# Altium PCB Copy of sample_sogipll_test.PcbDoc
Units mm, origin at the board's own origin, x right, y up, seen from the top; angles counter-clockwise.
Board outline 72 x 53 mm, 2 copper layers (Top Layer, Bottom Layer), stack 1.671 mm thick; 29 components, 23 nets, 123 pads, 10 vias.
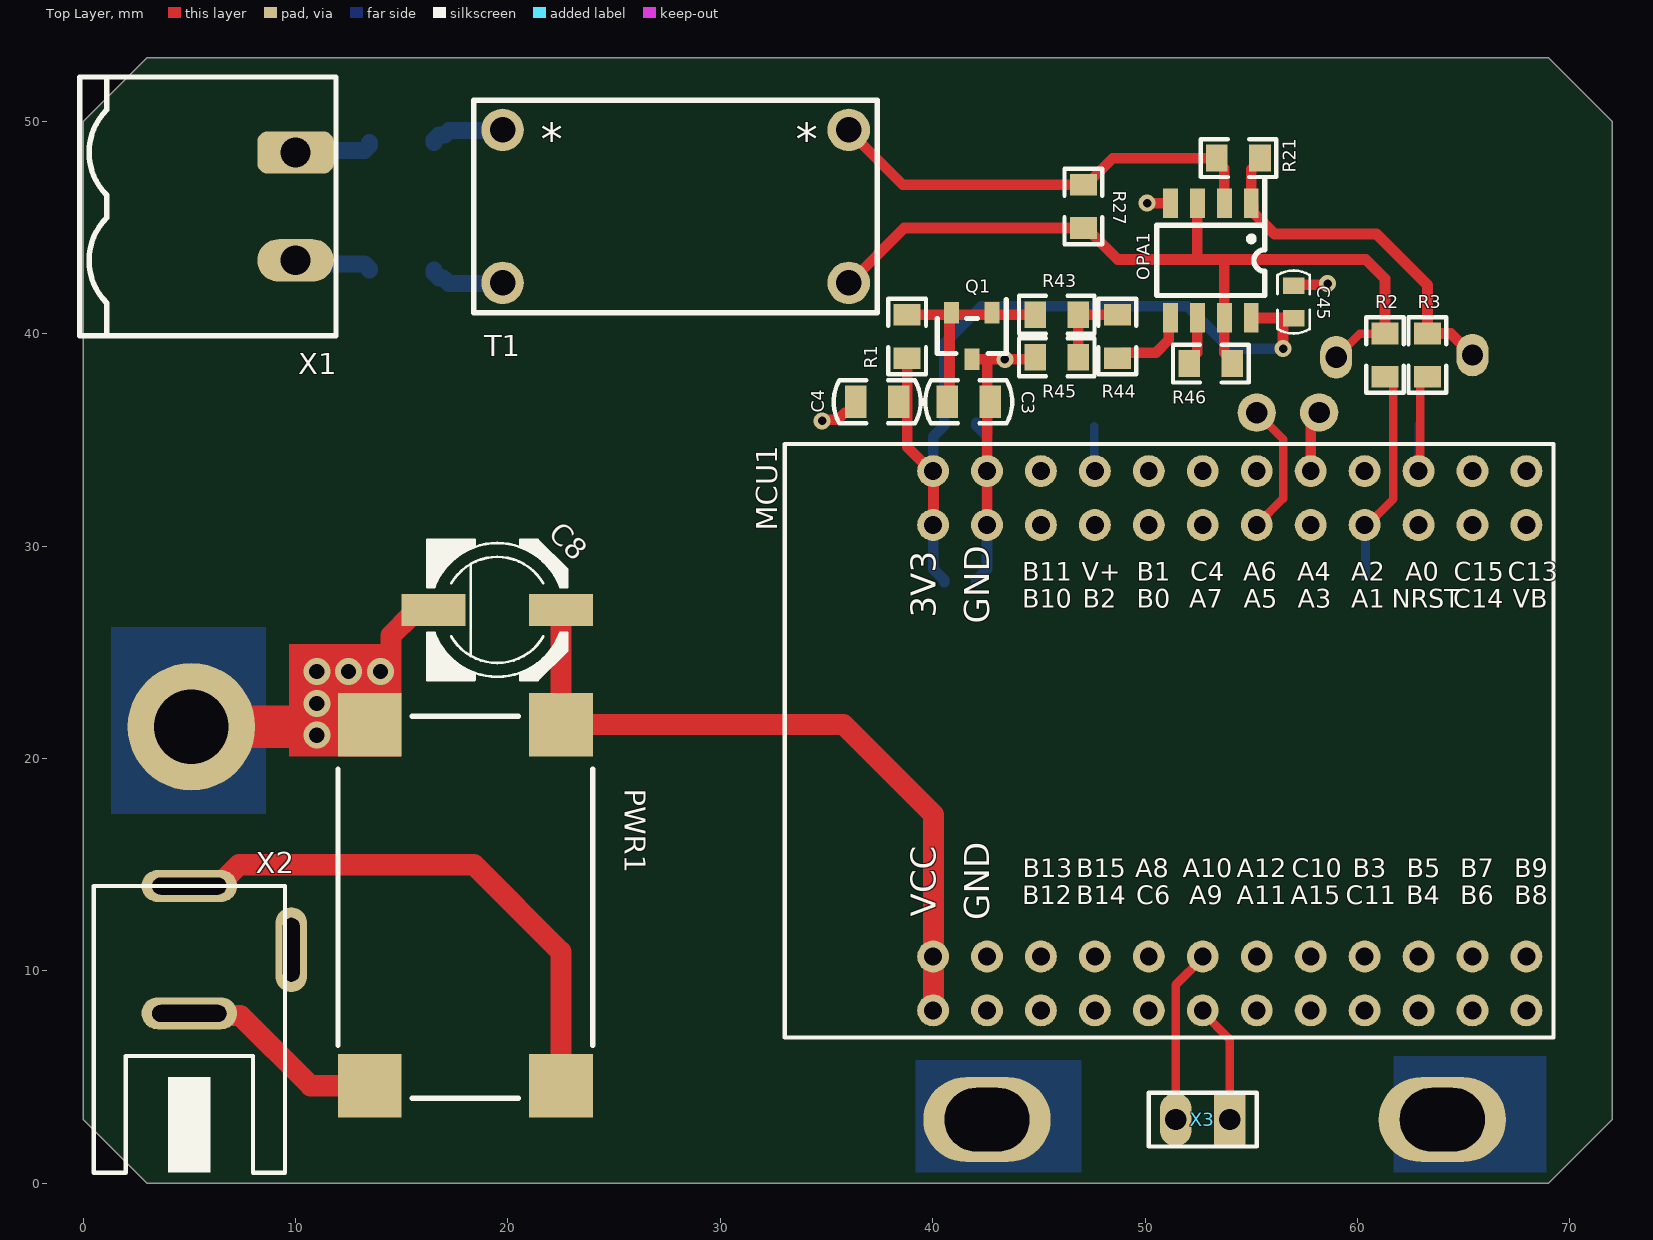
[diagram p0: Top Layer view]
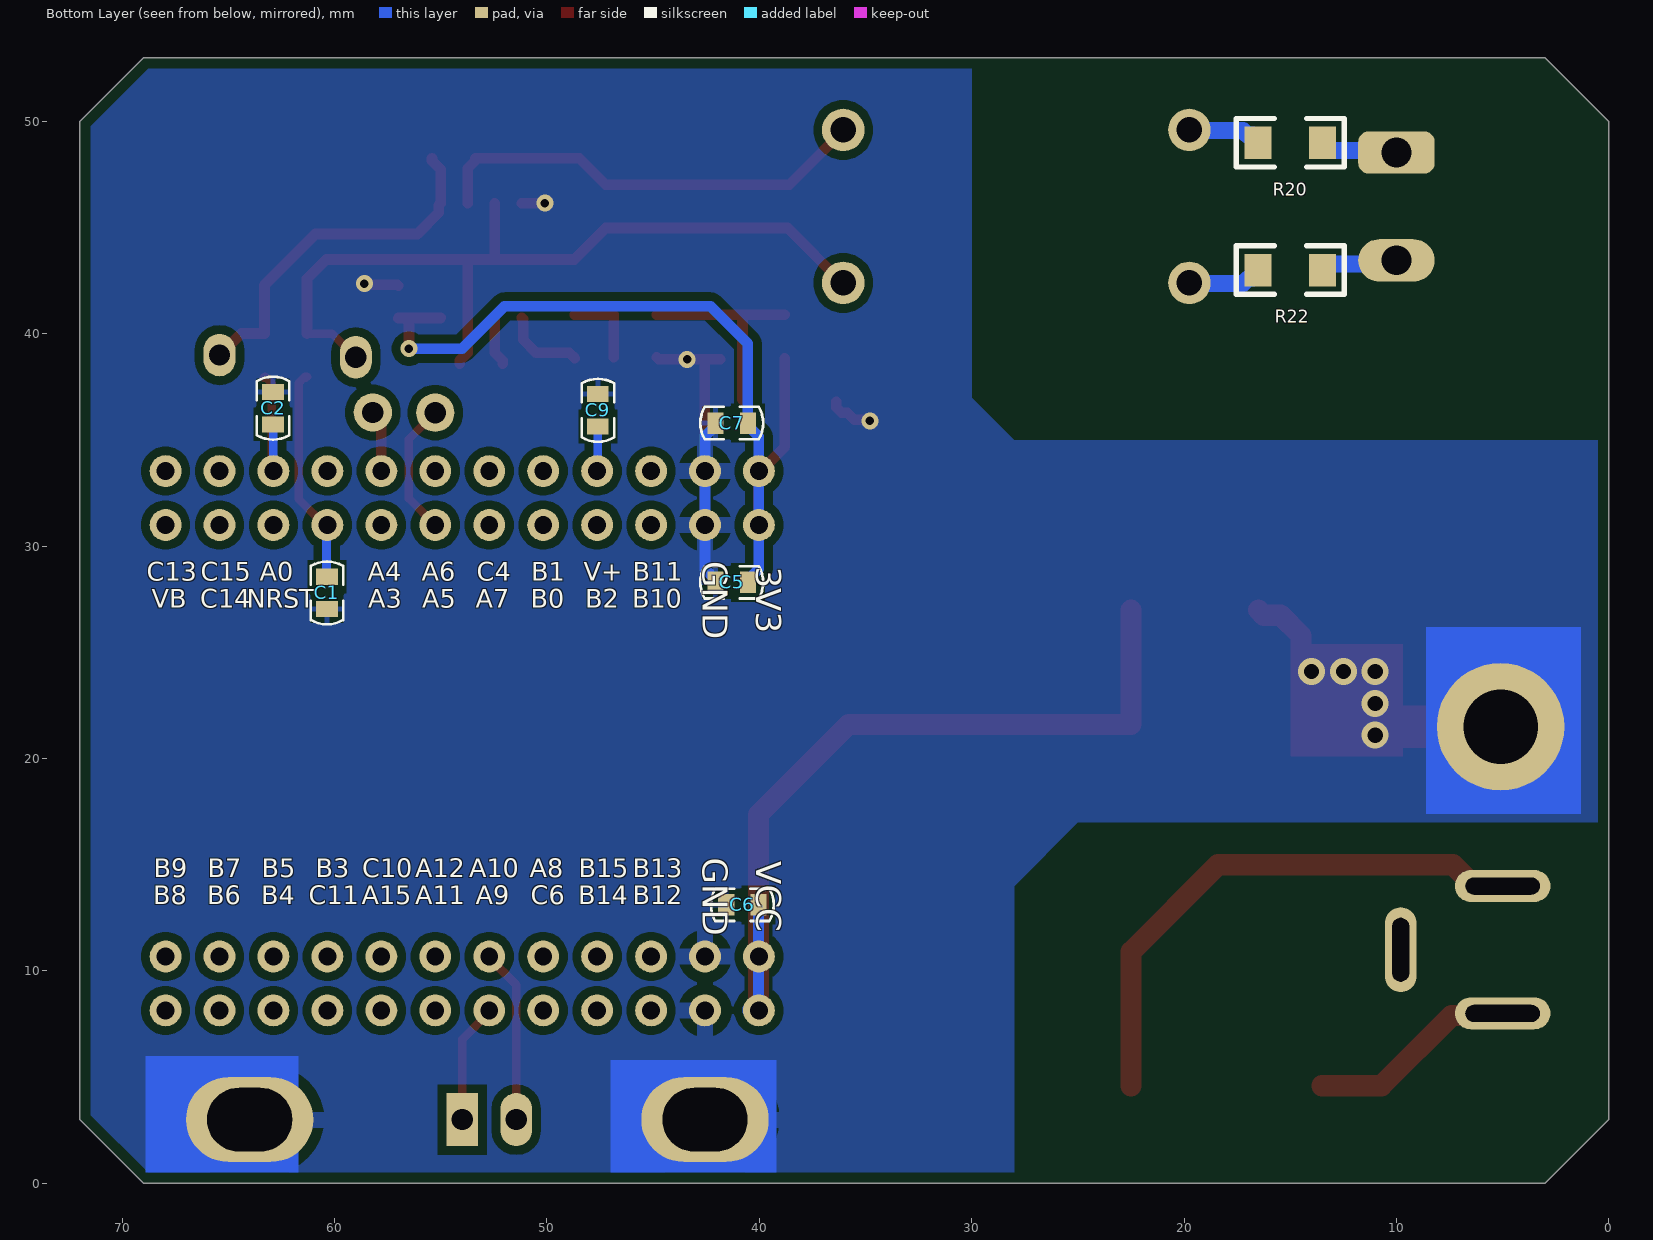
[diagram p1: Bottom Layer view, seen from below]

## Layer stack, top to bottom
Top Solder: solder mask 0.0102, Solder Resist, Dk 3.5
Top Layer: signal copper 0.0356
Dielectric 1: dielectric 1.6, FR-4, Dk 4.8
Bottom Layer: signal copper 0.0356
Bottom Solder: solder mask 0.0102, Solder Resist, Dk 3.5

## Board outline
0,3 0,50 3,53 69,53 72,50 72,3 69,0 3,0

## Design rules (kind name [scope] priority, off if disabled: settings)
BoardOutlineClearance [All] p1: gap=0.254 ignorepadtopadclearanceinfootprint=FALSE except(0: Arc-SplitContinuation Track-SplitContinuation SMDPad-SplitContinuation THPad-SplitContinuation Via-SplitContinuation Fill-SplitContinuation Poly-SplitContinuation Region-SplitContinuation Text-SplitContinuation; 0.508: Poly-OutlineEdge)
Clearance [All] p1: gap=0.2 ignorepadtopadclearanceinfootprint=FALSE except(0.4: Arc-Fill Arc-Poly Arc-Region Track-Fill Track-Poly Track-Region SMDPad-Fill SMDPad-Poly SMDPad-Region THPad-Fill THPad-Poly THPad-Region Via-Fill Via-Poly Via-Region Fill-Fill Fill-Poly Fill-Region Poly-Poly Poly-Region Region-Region)
Height [All] p1: minheight=0 maxheight=254 prefheight=12.7
HoleSize [All] p1: absolutevalues=TRUE maxlimit=12.7 minlimit=0.025 maxpercent=80.000 minpercent=20.000
PolygonConnect [All] p1: thpad.connectstyle=Relief thpad.reliefconductorwidth=0.762 thpad.reliefentries=4 thpad.polygonreliefangle="90 Angle" thpad.airgapwidth=0.508 smdpad.connectstyle=Relief smdpad.reliefconductorwidth=0.254 smdpad.reliefentries=4 smdpad.polygonreliefangle="90 Angle" smdpad.airgapwidth=0.254 via.connectstyle=Direct via.reliefconductorwidth=0.254 via.reliefentries=4 via.polygonreliefangle="90 Angle" via.airgapwidth=0.254
RoutingVias [All] p1: holewidth=0.711 width=1.27 viastyle="Through Hole" minholewidth=0.076 minwidth=0.127 maxholewidth=0.711 maxwidth=1.27
SilkToSilkClearance [All] p1: silktosilkclearance=-0.025
SilkToSolderMaskClearance [IsPad] p1: minsilkscreentomaskgap=-0.025 clearancetoexposedcopper=TRUE
SolderMaskExpansion [All] p1: expansion=0.102 istentingtop=FALSE
Width [All] p1: maxlimit=254 minlimit=0.127 preferedwidth=0.254
26 further rules are at their usual default settings.

## Components (designator, comment, footprint, x,y, rotation, side; value= is the part's Value field where it differs from the comment)
C1 "10nF" 0603C 60.36,27.8 r270 bottom
C2 "10nF" 0603C 62.9,36.5 r90 bottom
C3 "10uF" 0805C 41.7,36.8 r0 top
C4 "10uF" 0805C 37.389,36.8 r180 top
C5 "100nF" 0603C 41.3,28.3 r0 bottom
C6 "100nF" 0603C 40.8,13.11 r0 bottom
C7 "100nF" 0603C 41.3,35.8 r0 bottom
C8 "CAP Pol" CAP-ALU-SMD-06.3 19.5,27 r270 top
C9 "100nF" 0603C 47.6,36.4 r90 bottom
C45 "100nF" 0603C 57,41.5 r90 top
MCU1 "WeArt STM32G431CBU6" "WEART STM32G431CBU6" 53.99,20.84 r0 top
OPA1 "LMV358" "SO-08 - P1.27MM" 53.1,43.455 r270 top
PWR1 "DCDC_module" MiniDCDC 18,13 r90 top
Q1 "TL431 SOT-23" sot-23 41.845,39.899 r180 top
R1 "100R" 0805R 38.8,39.876 r270 top value=10K
R2 "100R" 0805R 61.3,39 r270 top value=10K
R3 "100R" 0805R 63.3,39 r270 top value=10K
R20 "200k" 1206R 15,49 r180 bottom value=10K
R21 "2k" 0805R 54.4,48.275 r180 top value=10K
R22 "200k" 1206R 15,43 r180 bottom value=10K
R27 "2k" 0805R 47.1,46 r270 top value=10K
R43 "10k" 0805R 45.845,40.899 r180 top value=10K
R44 "10k" 0805R 48.7,39.876 r270 top value=10K
R45 "20k" 0805R 45.845,38.899 r0 top value=10K
R46 "10k" 0805R 53.1,38.6 r0 top value=10K
T1 "ZMPT107" ZMPT107-1 27.9,46 r0 top
X1 "Header 2" 2EDGRG-5.08-02P 10,46 r270 top
X2 "DC_Port" DC-5.5mm 5,11 r90 top
X3 "Header 2" HDR1X2 52.72,3 r180 top

## Footprints (in the part's own frame and the unit in brackets; to place one, negate y for a bottom-side part, rotate by r counter-clockwise, add the part's x,y. Pads: shape width x height; smd on the part's side, far side on the other; paste and mask are expansions set on the pad)
2EDGRG-5.08-02P [mm]
  rrect50% 2x3.6 hole 1.4: 1(-2.54,0)
  oval 2x3.6 hole 1.4: 2(2.54,0)
  silkscreen extent -6.1,-10.16 6.1,1.91, body extent -6,-10 6,2, height 8.6
0603C [mil]
  rect 30x40 smd: 1(-30,0) 2(30,0)
  silkscreen extent -58,-30 58,30, body extent -31,-16 31,16, height 31
0805C [mil]
  rect 40x60 smd: 1(-40,0) 2(40,0)
  silkscreen extent -80,-40 80,40, body extent -39,-24 39,24, height 47
0805R [mil]
  rect 40x50 smd: 1(-40,0) 2(40,0)
  silkscreen extent -70,-35 70,35, body extent -39,-25 39,25, height 18
1206R [mil]
  rect 50x60 smd: 1(-60,0) 2(60,0)
  silkscreen extent -100,-45 100,45, body extent -63,-31 63,31, height 22
CAP-ALU-SMD-06.3 [mm]
  rect 1.5x3 smd: 1(0,3) 2(0,-3)
  silkscreen extent -3.3,-3.3 3.3,3.3, body extent -3.3,-3.65 3.3,3.65, height 5.8
DC-5.5mm [mm]
  oval 1.5x4.5 hole 0.8 slot 3.5 at 90 deg: 1(3,0) 3(-3,0)
  oval 4x1.5 hole 0.8 slot 3 at 0 deg: 2(0,-4.8)
  silkscreen extent -10.5,-4.5 3,4.5
HDR1X2 [mm]
  rect 1.5x2.5 hole 1: 1(-1.27,0)
  oval 1.5x2.5 hole 1: 2(1.27,0)
  silkscreen extent -2.54,-1.27 2.54,1.27, body extent -2.54,-1.27 2.54,1.27, height 8.38
MiniDCDC [mm]
  rect 3x3 smd: 1(-8.4,-4.5) 2(-8.4,4.5) 3(8.6,-4.5) 4(8.6,4.5)
  silkscreen extent -9,-6 9,6
"SO-08 - P1.27MM" [mm]
  rect 1.4x0.7 smd: 1(-2.7,1.905) 2(-2.7,0.635) 3(-2.7,-0.635) 4(-2.7,-1.905) 5(2.7,-1.905) 6(2.7,-0.635) 7(2.7,0.635) 8(2.7,1.905)
  silkscreen extent -3.81,-2.54 1.65,2.54, body extent -3,-2.45 3,2.45, height 1.59
sot-23 [mm]
  rect 0.7x1 smd: 1(-0.95,-1.1) 2(0.95,-1.1) 3(0,1.1)
  silkscreen extent -1.62,-1.71 1.63,0.82, body extent -1.46,-1.17 1.46,1.17, height 1
"WEART STM32G431CBU6" [mil]
  round 59 hole 33 paste+0 mask+1: 1(550,-400) 2(550,-500) 3(450,-400) 4(450,-500) 5(350,-400) 6(350,-500) 7(250,-400) 8(250,-500) 9(150,-400) 10(150,-500) 11(50,-400) 12(50,-500) 13(-50,-400) 14(-50,-500) 15(-150,-400) 16(-150,-500) 17(-250,-400) 18(-250,-500) 19(-350,-400) 20(-350,-500) 21(-450,-400) 22(-450,-500) 23(-550,-400) 24(-550,-500) 25(550,500) 26(550,400) 27(450,500) 28(450,400) 29(350,500) 30(350,400) 31(250,500) 32(250,400) 33(150,500) 34(150,400) 35(50,500) 36(50,400) 37(-50,500) 38(-50,400) 39(-150,500) 40(-150,400) 41(-250,500) 42(-250,400) 43(-350,500) 44(-350,400) 45(-450,500) 46(-450,400) 47(-550,500) 48(-550,400)
  silkscreen extent -825,-550 600,550, body extent -600,-550 600,550, height 236
ZMPT107-1 [mm]
  round 2 hole 1.2: 1(-8.15,3.6) 2(-8.15,-3.6) 3(8.15,3.6) 4(8.15,-3.6)
  silkscreen extent -9.5,-5 9.5,5, body extent -9.5,-5 9.5,5, height 18.2

## Part data
C1 C2 C3 C4 C5 C6 C7 C9 C45: library part CAP
OPA1: library part LM258, "Operational Amplifier", Manufacture=TI, Published=20101030, Publisher=zly, Type=LM258D/OPA2227/tlc082
PWR1: BOM_JLCPCB SMD=Yes, BOM_Manufacturer=XLSEMI, BOM_Manufacturer Part=XL2596T-12E1, BOM_Supplier=LCSC, BOM_Supplier Part=C74187, image=//image.lceda.cn/szlcsc/C74187.jpg, SMT Type=Extend, spicePre=U, spiceSymbolName=XL2596T-12E1
Q1: Manufacture="TEXAS INSTRUMENTS"
R1 R2 R3 R20 R21 R22 R27 R43 R44 R45 R46: library part Res1, "Resistor", Published=20101211, Publisher=zly, Revision="July-2002: Re-released for DXP Platform."
T1: library part Trans, "DVDI-001", Published=20101030, Publisher=zly
X1 X2 X3: Published=20101030, Publisher=zly

## Free pads (board coordinates)
  round 1.8 hole 1: 2(55.26,36.288) 2(58.2,36.3)
  oval 1.5x2 hole 1: 2(59,38.899) 2(65.42,39)
  round 6 hole 3.5: 3(5.096,21.5)
  oval 6x4 hole 3 slot 4 at 0 deg: ""(42.56,3) ""(64,3)

## Via types
v1: diameter 0.8, hole 0.4, Top Layer to Bottom Layer, tented both sides, 5 vias
v2: diameter 1.27, hole 0.711, Top Layer to Bottom Layer, 5 vias

## Nets (pads, with @x,y where several pads share a name; then routed paths per layer and width w, separated by ;. In a path a pad name is that pad's centre, name@x,y a point inside that pad or via, vN(x,y) a via of type N, cw(c..) or ccw(c..) an arc to the next point about the centre after c; other vN are vias at no path point)
+3.3: C4.1 C5.1 C7.1 C45.1 MCU1.47 MCU1.48 OPA1.8 R1.2 | length 41.2
  Top Layer w0.5: R1.2 38.8,34.67 40.04,33.43 MCU1.48@40.04,30.89 ; OPA1.8 55.013,40.746 C45.1@56.7,40.746 ; v1(56.5,39.3) 56.5,40.546 C45.1@56.7,40.746 ; C45.1 56.992,40.746 C45.1@56.7,40.746
  Bottom Layer w0.5: C5.1 40.538,28.427 40.02,28.945 40.02,30.87 40.02,35.155 40.538,35.673 C7.1 40.538,39.538 42.3,41.3 52,41.3 54,39.3 v1(56.5,39.3)
+5: C6.1 C8.1 MCU1.23 MCU1.24 PWR1.3 | length 39.1
  Top Layer w1: C8.1 PWR1.3 35.8,21.6 40.04,17.36 MCU1.24@40.04,8.14
  Bottom Layer w0.5: C6.1@40.04,13.11 40.04,8.725 40.538,8.227 MCU1.24@40.538,8.1
ADC1_IN1: C2.1 MCU1.29 R3.2 | length 7.1
  Top Layer w0.4: MCU1.29@62.9,33.43 62.955,33.485 62.955,37.676 63.263,37.984 R3.2 R3.2@63.342,37.942
  Bottom Layer w0.4: MCU1.29@62.9,33.43 C2.1
ADC1_IN2: C1.1 MCU1.32 R2.2 | length 12.6
  Top Layer w0.4: MCU1.32@60.36,30.89 61.7,32.23 61.7,37.676 R2.2@61.392,37.984 ; R2.2 R2.2@61.392,37.984 ; R2.2@61.35,37.942 R2.2@61.392,37.984
  Bottom Layer w0.4: C1.1 60.36,30.89 60.383,30.867 60.383,28.584 C1.1@60.405,28.562
DAC1_OUT1: MCU1.33 pad.2@58.2,36.3 | length 2.9
  Top Layer w0.5: MCU1.33 57.8,35.9 pad.2@58.2,36.3
DAC1_OUT2: MCU1.36 pad.2@55.26,36.288 | length 6.3
  Top Layer w0.4: MCU1.36 56.5,32.24 56.5,35.048 pad.2@55.26,36.288
GND: C1.2 C2.2 C3.2 C4.2 C5.2 C6.2 C7.2 C8.2 C9.2 C45.2 MCU1.21 MCU1.22 MCU1.45 MCU1.46 OPA1.4 pad. pad.3 PWR1.4 Q1.3 R45.1 | length 38
  Top Layer w0.5: PWR1.4@13.4,21.5 PWR1.4 ; v1(34.8,35.9) 34.857,35.957 35.53,35.957 35.861,36.288 36.115,36.288 36.373,36.546 C4.2 ; Q1.3 42.623,38.799 ; MCU1.46@42.58,30.89 42.58,33.43 42.58,38.756 42.623,38.799 ; R45.1 44.729,38.799 v1(43.4,38.799) 42.623,38.799 ; v1(50.1,46.155) OPA1.4 ; C45.2 57.051,42.313 58.549,42.313 v1(58.6,42.364)
  Top Layer w1: v2(12.5,24.1) v2(14,24.1) 14,24.4 14.5,24.9 14.5,25.8 15.45,26.75 16.25,26.75 C8.2
  Top Layer w2: pad.3 PWR1.4@13.4,21.5
  Bottom Layer w0.5: C5.2 42.062,28.427 42.56,28.925 42.56,30.87 42.56,35.175 42.062,35.673 C7.2
  other v2: 11,21.1 11,22.6 11,24.1
NetOPA1_2: OPA1.2 R21.2 R27.1 T1.3 | length 21.2
  Top Layer w0.5: T1.3@36.05,49.564 38.598,47.016 R27.1 47.227,47.016 48.486,48.275 R21.2 53.384,48.148 53.735,47.798 OPA1.2
NetOPA1_5: OPA1.5 R44.2 | length 3.8
  Top Layer w0.5: R44.2 48.958,39.118 50.518,39.118 51.119,39.719 51.119,40.679 OPA1.5
NetOPA1_6: OPA1.6 R46.1 | length 2.3
  Top Layer w0.5: R46.1 52.084,38.727 52.465,39.108 OPA1.6
NetR20_1: R20.1 T1.1 | length 3.5
  Bottom Layer w0.8: R20.1 16.524,49.127 16.759,49.362 17.026,49.362 17.228,49.564 T1.1@19.75,49.564
NetR22_1: R22.1 T1.2 | length 3.6
  Bottom Layer w0.8: R22.1 16.524,42.873 16.759,42.638 16.954,42.638 17.228,42.364 T1.2@19.75,42.364
NetR43_1: R43.1 R44.1 R45.2 | length 3.8
  Top Layer w0.5: R45.2 R43.1 ; R43.1@46.868,40.892 R44.1
REF1: OPA1.3 OPA1.7 pad.2@59,38.899 R2.1 R27.2 R46.2 T1.4 | length 40.6
  Top Layer w0.4: pad.2@59,38.899 60.117,40.016 R2.1
  Top Layer w0.5: T1.4@36.253,42.364 36.05,42.364 38.67,44.984 R27.2 47.227,44.984 48.711,43.5 52.465,43.5 ; OPA1.3 52.465,43.5 ; R46.2 54.116,38.727 53.735,39.108 OPA1.7 53.735,43.5 ; R2.1 61.3,42.597 60.397,43.5 53.735,43.5 ; 52.465,43.5 53.735,43.5
REF2.5: C3.1 Q1.1 Q1.2 R1.1 R43.2 | length 10.2
  Top Layer w0.5: R1.1 38.803,40.895 44.826,40.895 R43.2 ; C3.1 40.795,36.911 Q1.2@40.795,40.892
Uin+: PWR1.1 X2.1 | length 25.9
  Top Layer w1: X2.1 6.365,14 6.75,14.385 6.75,14.414 7.336,15 18.4,15 22.5,10.9 PWR1.1
Uin-: PWR1.2 X2.3 | length 9.9
  Top Layer w1: X2.3 5.096,7.904 7.396,7.904 10.7,4.6 PWR1.2
UL: R22.2 X1.2 | length 3.7
  Bottom Layer w0.8: X1.2 10.16,43.3 13.241,43.3 13.476,43.065 R22.2
UL_sample: OPA1.1 pad.2@65.42,39 R3.1 R21.1 | length 17.2
  Top Layer w0.5: R21.1 55.416,48.148 55.005,47.737 OPA1.1 55.105,46.055 55.105,45.695 56.1,44.7 60.9,44.7 63.3,42.3 R3.1 64.404,40.016 pad.2@65.42,39
UN: R20.2 X1.1 | length 3.7
  Bottom Layer w0.8: X1.1 10.098,48.638 13.241,48.638 13.476,48.873 R20.2
USART1_RX: MCU1.13 X3.2 | length 8.1
  Top Layer w0.4: X3.2 51.45,9.35 MCU1.13@52.7,10.6
USART1_TX: MCU1.14 X3.1 | length 5.6
  Top Layer w0.4: MCU1.14@52.7,8.07 53.99,6.78 X3.1
V+: C9.1 MCU1.41 | length 2.1
  Bottom Layer w0.4: C9.1 47.62,35.618 47.62,33.53 MCU1.41@47.64,33.51
pads on no net: MCU1.1 MCU1.2 MCU1.3 MCU1.4 MCU1.5 MCU1.6 MCU1.7 MCU1.8 MCU1.9 MCU1.10 MCU1.11 MCU1.12 MCU1.15 MCU1.16 MCU1.17 MCU1.18 MCU1.19 MCU1.20 MCU1.25 MCU1.26 MCU1.27 MCU1.28 MCU1.30 MCU1.31 MCU1.34 MCU1.35 MCU1.37 MCU1.38 MCU1.39 MCU1.40 MCU1.42 MCU1.43 MCU1.44 X2.2

## Polygon pours and split planes (outlines as drawn)
GND on Bottom Layer "GND_L02_P000" (solid, remove dead copper, pour order 0): 0,17 25,17 28,14 28,0.3 72,0.3 72,53 30,53 30,37 28,35 0,35

## Other copper
Top Layer:
  rectangle net GND: 9.7,20.1 15,25.4
Bottom Layer:
  rectangle net GND: 1.3,17.4 8.6,26.2
  rectangle net GND: 39.2,0.5 47,5.8
  rectangle net GND: 61.7,0.5 68.9,6

## Silkscreen, mask and mechanical layers (free items; w line width, h text height)
Mechanical 1:
  the board outline again, w0.2

## Text inside footprints (layer, text, board x,y; h text height)
MCU1: Top Overlay "3V3" at 40.537,26.622 h2 r90; Top Overlay "GND" at 43.077,26.351 h2 r90; Top Overlay "B11" at 44.228,28.069 h1.5; Top Overlay "B10" at 44.216,26.802 h1.5; Top Overlay "V+" at 47.017,28.072 h1.5; Top Overlay "B2" at 47.08,26.796 h1.5; Top Overlay "B1" at 49.619,28.069 h1.5; Top Overlay "B0" at 49.607,26.802 h1.5; Top Overlay "C4" at 52.128,28.072 h1.5; Top Overlay "A7" at 52.092,26.802 h1.5; Top Overlay "A6" at 54.627,28.072 h1.5; Top Overlay "A5" at 54.639,26.806 h1.5; Top Overlay "A4" at 57.161,28.072 h1.5; Top Overlay "A3" at 57.181,26.802 h1.5; Top Overlay "A2" at 59.717,28.067 h1.5; Top Overlay "A1" at 59.717,26.801 h1.5; Top Overlay "A0" at 62.245,28.072 h1.5; Top Overlay "NRST" at 61.624,26.802 h1.5; Top Overlay "C15" at 64.535,28.073 h1.5; Top Overlay "C14" at 64.517,26.802 h1.5; Top Overlay "C13" at 67.076,28.072 h1.5; Top Overlay "VB" at 67.314,26.802 h1.5; Top Overlay "B3" at 59.783,14.102 h1.5; Top Overlay "B9" at 67.397,14.102 h1.5; Top Overlay "C10" at 56.9,14.102 h1.5; Top Overlay "A12" at 54.326,14.097 h1.5; Top Overlay "B7" at 64.855,14.103 h1.5; Top Overlay "B5" at 62.322,14.107 h1.5; Top Overlay "B8" at 67.391,12.832 h1.5; Top Overlay "C11" at 59.452,12.832 h1.5; Top Overlay "B6" at 64.85,12.832 h1.5; Top Overlay "B4" at 62.304,12.832 h1.5; Top Overlay "A15" at 56.868,12.835 h1.5; Top Overlay "A11" at 54.325,12.831 h1.5; Top Overlay "B14" at 46.752,12.831 h1.5; Top Overlay "B15" at 46.77,14.105 h1.5; Top Overlay "B12" at 44.228,12.826 h1.5; Top Overlay "VCC" at 40.537,12.554 h2 r90; Top Overlay "A9" at 52.095,12.832 h1.5; Top Overlay "B13" at 44.232,14.102 h1.5; Top Overlay "A10" at 51.773,14.102 h1.5; Top Overlay "GND" at 43.077,12.381 h2 r90; Top Overlay "C6" at 49.594,12.832 h1.5; Top Overlay "A8" at 49.549,14.102 h1.5; Bottom Overlay "B3" at 60.897,14.102 h1.5; Bottom Overlay "B9" at 68.523,14.102 h1.5; Bottom Overlay "C10" at 58.7,14.102 h1.5; Bottom Overlay "A12" at 56.194,14.097 h1.5; Bottom Overlay "B7" at 65.985,14.103 h1.5; Bottom Overlay "B5" at 63.438,14.107 h1.5; Bottom Overlay "B8" at 68.529,12.832 h1.5; Bottom Overlay "C11" at 61.228,12.832 h1.5; Bottom Overlay "B6" at 65.99,12.832 h1.5; Bottom Overlay "B4" at 63.456,12.832 h1.5; Bottom Overlay "A15" at 58.732,12.835 h1.5; Bottom Overlay "A11" at 56.195,12.831 h1.5; Bottom Overlay "B14" at 48.528,12.831 h1.5; Bottom Overlay "B15" at 48.51,14.105 h1.5; Bottom Overlay "B12" at 45.972,12.826 h1.5; Bottom Overlay "VCC" at 40.537,15.156 h2 r90; Bottom Overlay "A9" at 53.345,12.832 h1.5; Bottom Overlay "B13" at 45.968,14.102 h1.5; Bottom Overlay "A10" at 53.667,14.102 h1.5; Bottom Overlay "GND" at 43.077,15.329 h2 r90; Bottom Overlay "C6" at 50.766,12.832 h1.5; Bottom Overlay "A8" at 50.811,14.102 h1.5; Bottom Overlay "3V3" at 40.537,29.028 h2 r90; Bottom Overlay "GND" at 43.077,29.299 h2 r90; Bottom Overlay "B11" at 45.972,28.069 h1.5; Bottom Overlay "B10" at 45.984,26.802 h1.5; Bottom Overlay "V+" at 48.263,28.072 h1.5; Bottom Overlay "B2" at 48.2,26.796 h1.5; Bottom Overlay "B1" at 50.741,28.069 h1.5; Bottom Overlay "B0" at 50.753,26.802 h1.5; Bottom Overlay "C4" at 53.312,28.072 h1.5; Bottom Overlay "A7" at 53.348,26.802 h1.5; Bottom Overlay "A6" at 55.893,28.072 h1.5; Bottom Overlay "A5" at 55.881,26.806 h1.5; Bottom Overlay "A4" at 58.439,28.072 h1.5; Bottom Overlay "A3" at 58.419,26.802 h1.5; Bottom Overlay "A0" at 63.515,28.072 h1.5; Bottom Overlay "NRST" at 64.136,26.802 h1.5; Bottom Overlay "C15" at 66.305,28.073 h1.5; Bottom Overlay "C14" at 66.323,26.802 h1.5; Bottom Overlay "C13" at 68.844,28.072 h1.5; Bottom Overlay "VB" at 68.606,26.802 h1.5
T1: Top Overlay "*" at 21.554,48.401 h1.52; Top Overlay "*" at 33.554,48.401 h1.52